# EAGLE board Hx711_schematic_V1_r1.0 (EAGLE 9.6.2)
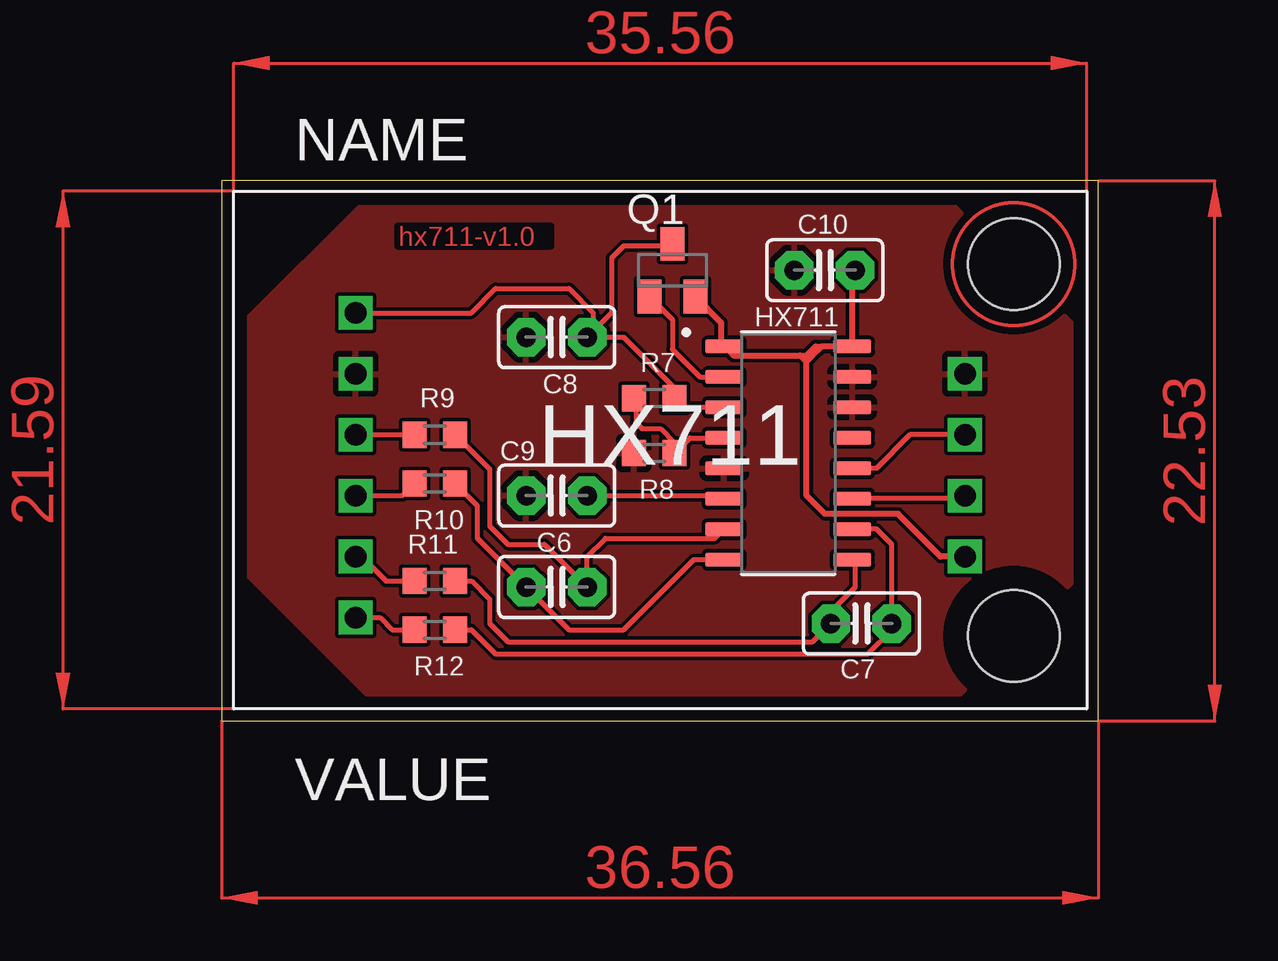
[diagram p0: board, top side]

Size 36.56 x 22.53 mm. Coordinates in mm from the lower left corner, seen from the top.
Outline: 0,0 36.56,0 36.56,22.53 0,22.53 0,0
Copper layers (1*16): Top 0.035mm / dielectric 1.5mm / Bottom 0.035mm
Design rules "default": minimum track width 6mil, minimum drill 0.35mm, track to track 6mil, track to pad 6mil, pad to pad 6mil, via to via 6mil, smd to smd 6mil, copper to edge 40mil, drill to drill 6mil, minimum pad ring 10mil, minimum via ring 8mil, stop-mask expansion 4mil, vias tented up to drill 0mil, thermal gap 10mil
Holes 3.81 mm at 33.02,3.56 33.02,19.05

## Footprints (pad centres in the part's own frame; a part is rotated, then mirrored left to right if it is on the bottom)
C2.5-2 = drill 0.813 pad 1.6 octagon: 1 -1.27,0; 2 1.27,0
SOP127P600X180-16N = smd 1.58 x 0.59: 1 -2.67,4.445; 2 -2.67,3.175; 3 -2.67,1.905; 4 -2.67,0.635; 5 -2.67,-0.635; 6 -2.67,-1.905; 7 -2.67,-3.175; 8 -2.67,-4.445; 9 2.67,-4.445; 10 2.67,-3.175; 11 2.67,-1.905; 12 2.67,-0.635; 13 2.67,0.635; 14 2.67,1.905; 15 2.67,3.175; 16 2.67,4.445
SOT23 = smd 1 x 1.4: 1 -0.95,-1.1; 2 0.95,-1.1; 3 0,1.1
R0603 = smd 1 x 1.1: 1 -0.85,0; 2 0.85,0
HX711 = drill 0.9 square: A+ 8.89,21.59; A- 8.89,24.13; B+ 8.89,16.51; B- 8.89,19.05; DT 34.29,24.13; E+ 8.89,29.21; E- 8.89,26.67; GND 34.29,26.67; SCK 34.29,21.59; VCC 34.29,19.05

## Placement (x,y rotation side)
C6  0.1uF  [C2.5-2]  13.97,5.59 180 top
C7  0.1uF  [C2.5-2]  26.67,4.06 0 top
C8  10uF  [C2.5-2]  13.97,16 180 top
C9  0.1uF  [C2.5-2]  13.97,9.4 180 top
C10  10uF  [C2.5-2]  25.15,18.8 0 top
HX711  HX711  [SOP127P600X180-16N]  23.62,11.18 0 top
Q1  [SOT23]  18.8,18.8 0 top
R7  20K  [R0603]  18.03,13.46 180 top
R8  8.2K  [R0603]  18.03,11.18 0 top
R9  100  [R0603]  8.89,11.94 0 top
R10  100  [R0603]  8.89,9.91 0 top
R11  100  [R0603]  8.89,5.84 0 top
R12  100  [R0603]  8.89,3.81 0 top
U$1  [HX711]  -3.3,-12.19 0 top

## Library data of the parts
C6-C10 = capacitor-wima
HX711 = HX711ss; AVAILABILITY: Not in stock; DESCRIPTION: Precision 24-bit analog-to-digital converter (ADC) designed for weigh scales and industrial control applications to interface directly with a bridge sensor.; MF: AVIA SEMICONDUCTOR; MP: HX711; PACKAGE: None; PRICE: None
Q1 = semicon-smd-ipc
R7-R12 = rcl; SPICEPREFIX: R
U$1 = HX711

## Nets
+5V: C10.2 HX711.1 HX711.16 Q1.2 U$1.VCC
A+: R10.1 U$1.A+
A-: R9.1 U$1.A-
AVDD: C8.1 HX711.3 Q1.3 R7.1 U$1.E+
B+: R12.1 U$1.B+
B-: R11.1 U$1.B-
DT: HX711.12 U$1.DT
GND: C8.2 C9.2 C10.1 HX711.5 HX711.14 HX711.15 R8.1 U$1.E- U$1.GND
N$1: HX711.2 Q1.1
N$3: HX711.4 R7.2 R8.2
N$4: C6.1 HX711.7 R9.2
N$5: C6.2 HX711.8 R10.2
N$6: C7.1 HX711.9 R11.2
N$7: C7.2 HX711.10 R12.2
N$8: C9.1 HX711.6
SCK: HX711.11 U$1.SCK

## Tracks (layer width: path | path; a pad name or v marks a point on that pad's centre or on a via)
+5V
  Top 0.254: U$1.VCC 29.97,6.86 28.19,8.64 25.15,8.64 24.38,9.4 24.38,14.99 | 25.02,15.62 25.53,15.62 26.16,15.62 HX711.16 26.29,18.67 C10.2 | 24.38,14.99 24.64,15.24 | Q1.2 20.83,16.61 20.83,15.75 HX711.1 21.33,15.24 24.13,15.24 | 24.64,15.24 25.02,15.62 | 24.38,15.24 24.38,14.99 | 24.38,15.24 24.64,15.24 | 25.02,15.62 24.77,15.62 24.38,15.24 | 24.13,15.24 24.38,14.99 | 24.13,15.24 24.38,15.24
A+
  Top 0.203: R10.1 7.53,9.4 U$1.A+
A-
  Top 0.203: U$1.A- 6.6,11.94 R9.1
AVDD
  Top 0.203: C8.1 15.49,16.26 15.49,17.02 14.48,18.03 11.43,18.03 10.41,17.02 U$1.E+ | C8.1 16.76,16 18.88,13.88 R7.1 | 18.8,13.55 R7.1 | HX711.3 19.27,13.08 R7.1 | Q1.3 18.71,19.81 16.76,19.81 16.26,19.3 16.26,17.02 C8.1
B+
  Top 0.203: U$1.B+ 6.6,4.32 7.11,3.81 R12.1
B-
  Top 0.203: U$1.B- 5.84,6.86 6.86,5.84 R11.1
DT
  Top 0.203: HX711.12 27.3,10.54 28.7,11.94 U$1.DT
GND
  pour Top: 30.23,0.51 36.07,6.35 36.07,6.6 36.07,16 29.97,22.1 6.35,22.1 0.51,16.26 0.51,6.6 6.6,0.51
N$1
  Top 0.203: Q1.1 18.8,16.75 18.8,15.49 19.94,14.35 HX711.2
N$3
  Top 0.203: R7.2 17.27,13.37 17.27,12.45 17.53,12.19 18.29,12.19 18.88,11.6 R8.2 19.52,11.81 HX711.4
N$4
  Top 0.203: R9.2 11.18,10.5 11.18,8.13 11.94,7.37 13.46,7.37 C6.1 15.24,6.86 16,7.62 20.57,7.62 HX711.7
N$5
  Top 0.203: 9.91,9.74 R10.2 10.67,8.98 10.67,7.62 C6.2 14.48,3.81 16.76,3.81 19.68,6.73 HX711.8
N$6
  Top 0.203: R11.2 10.41,5.84 11.18,5.08 11.18,4.06 11.94,3.3 24.64,3.3 C7.1 25.4,4.57 26.42,5.59 26.42,6.61 HX711.9
N$7
  Top 0.203: R12.2 10.41,3.81 11.43,2.79 26.92,2.79 27.94,3.81 C7.2 27.94,7.37 27.3,8 HX711.10
N$8
  Top 0.203: C9.1 20.82,9.4 HX711.6
SCK
  Top 0.203: U$1.SCK 30.86,9.27 HX711.11
(copper drawn outside any net)
  shapes: Top area x4, Top circle x1

## Text on the board
Top: hx711-v1.0